# Altium PCB SectionC_BreakOut.PcbDoc
Units mm, origin at the board's own origin, x right, y up, seen from the top; angles counter-clockwise.
Board outline 78.8 x 84 mm, 2 copper layers (Top Layer, Bottom Layer), stack 1.569 mm thick; 55 components, 45 nets, 222 pads, 19 vias.
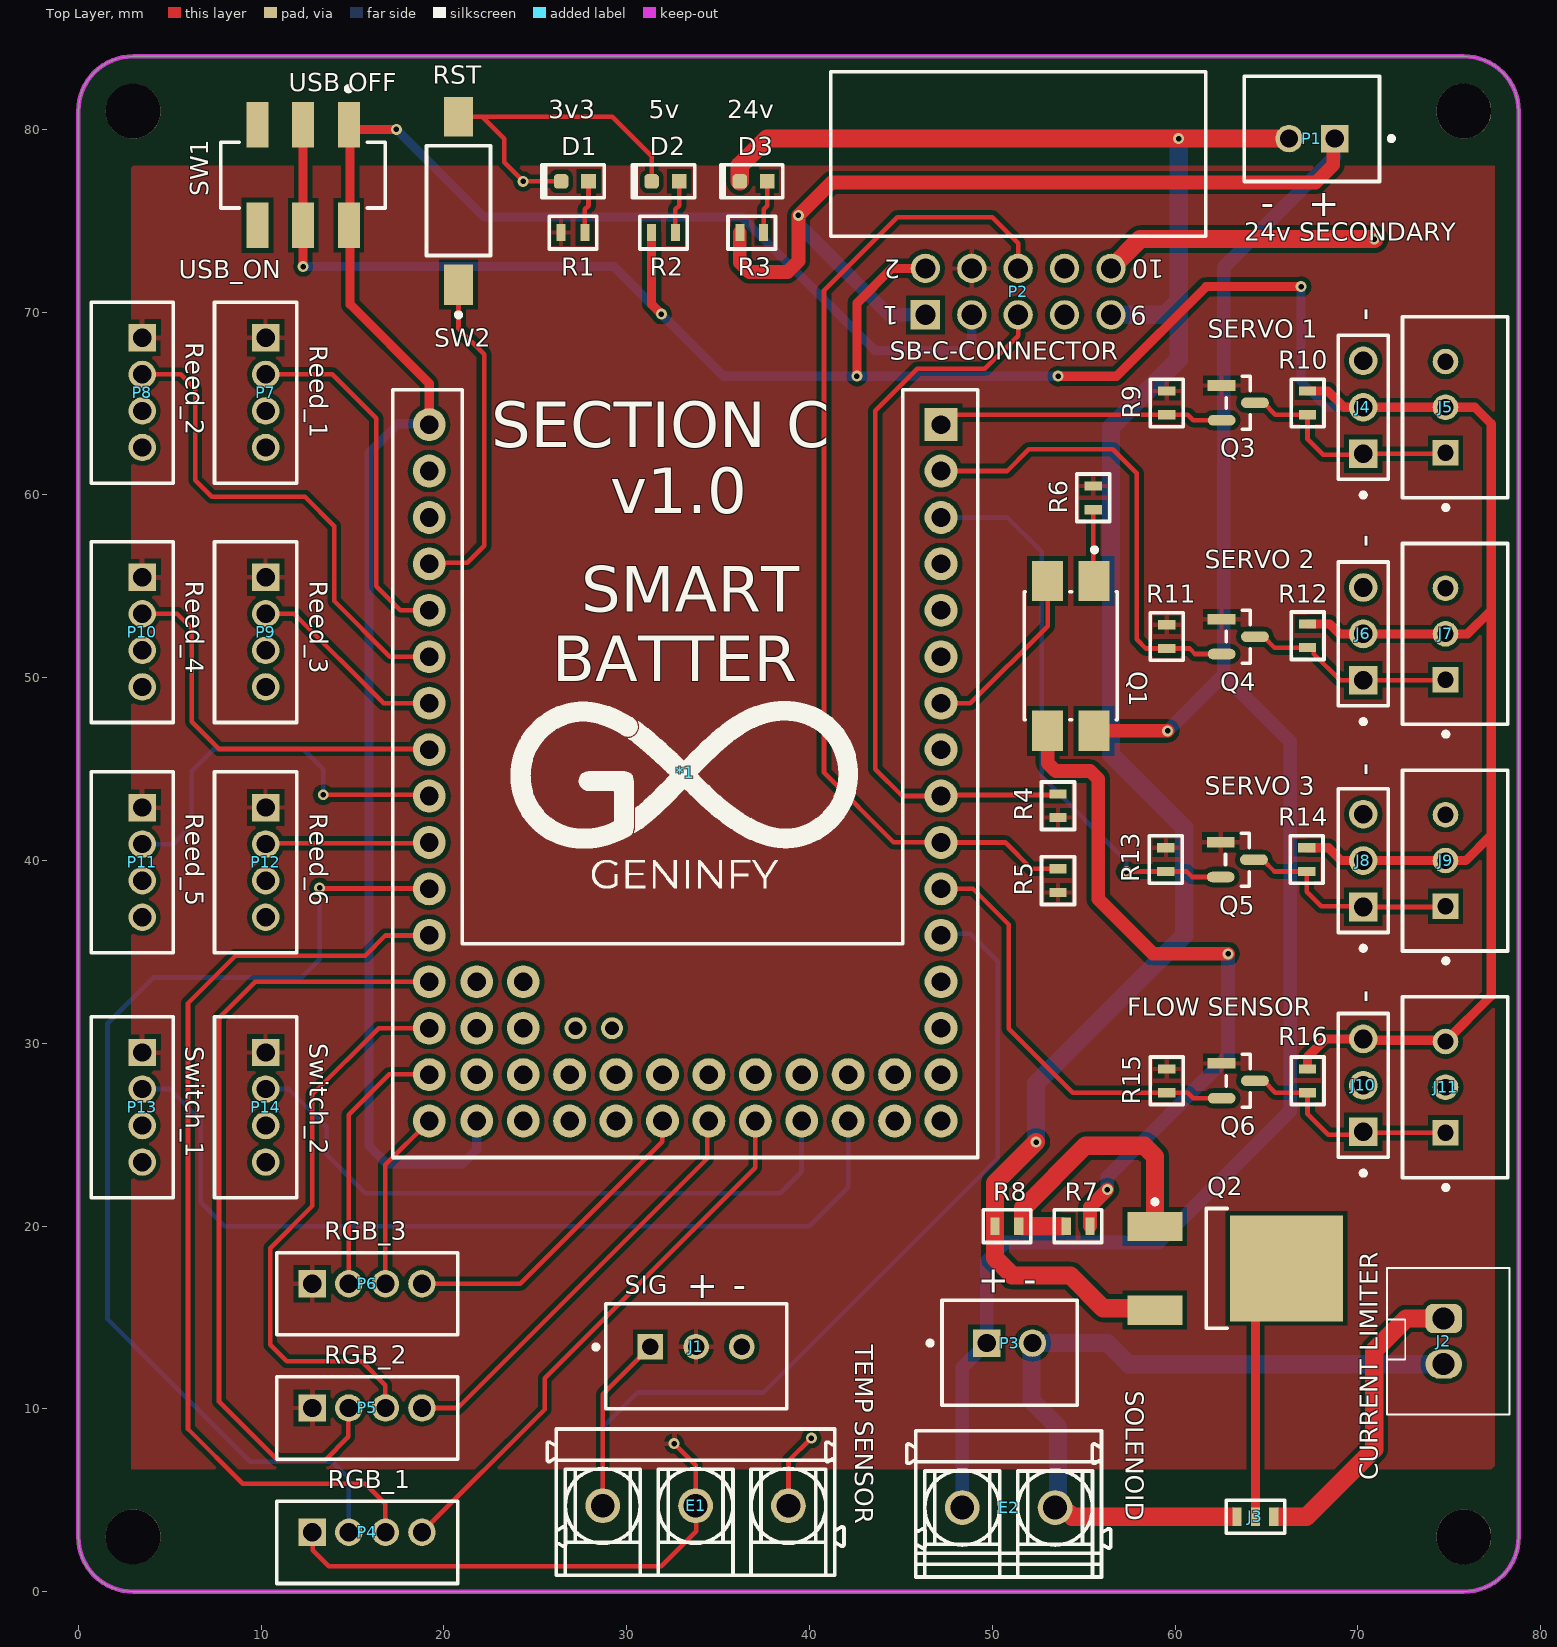
[diagram p0: Top Layer view]
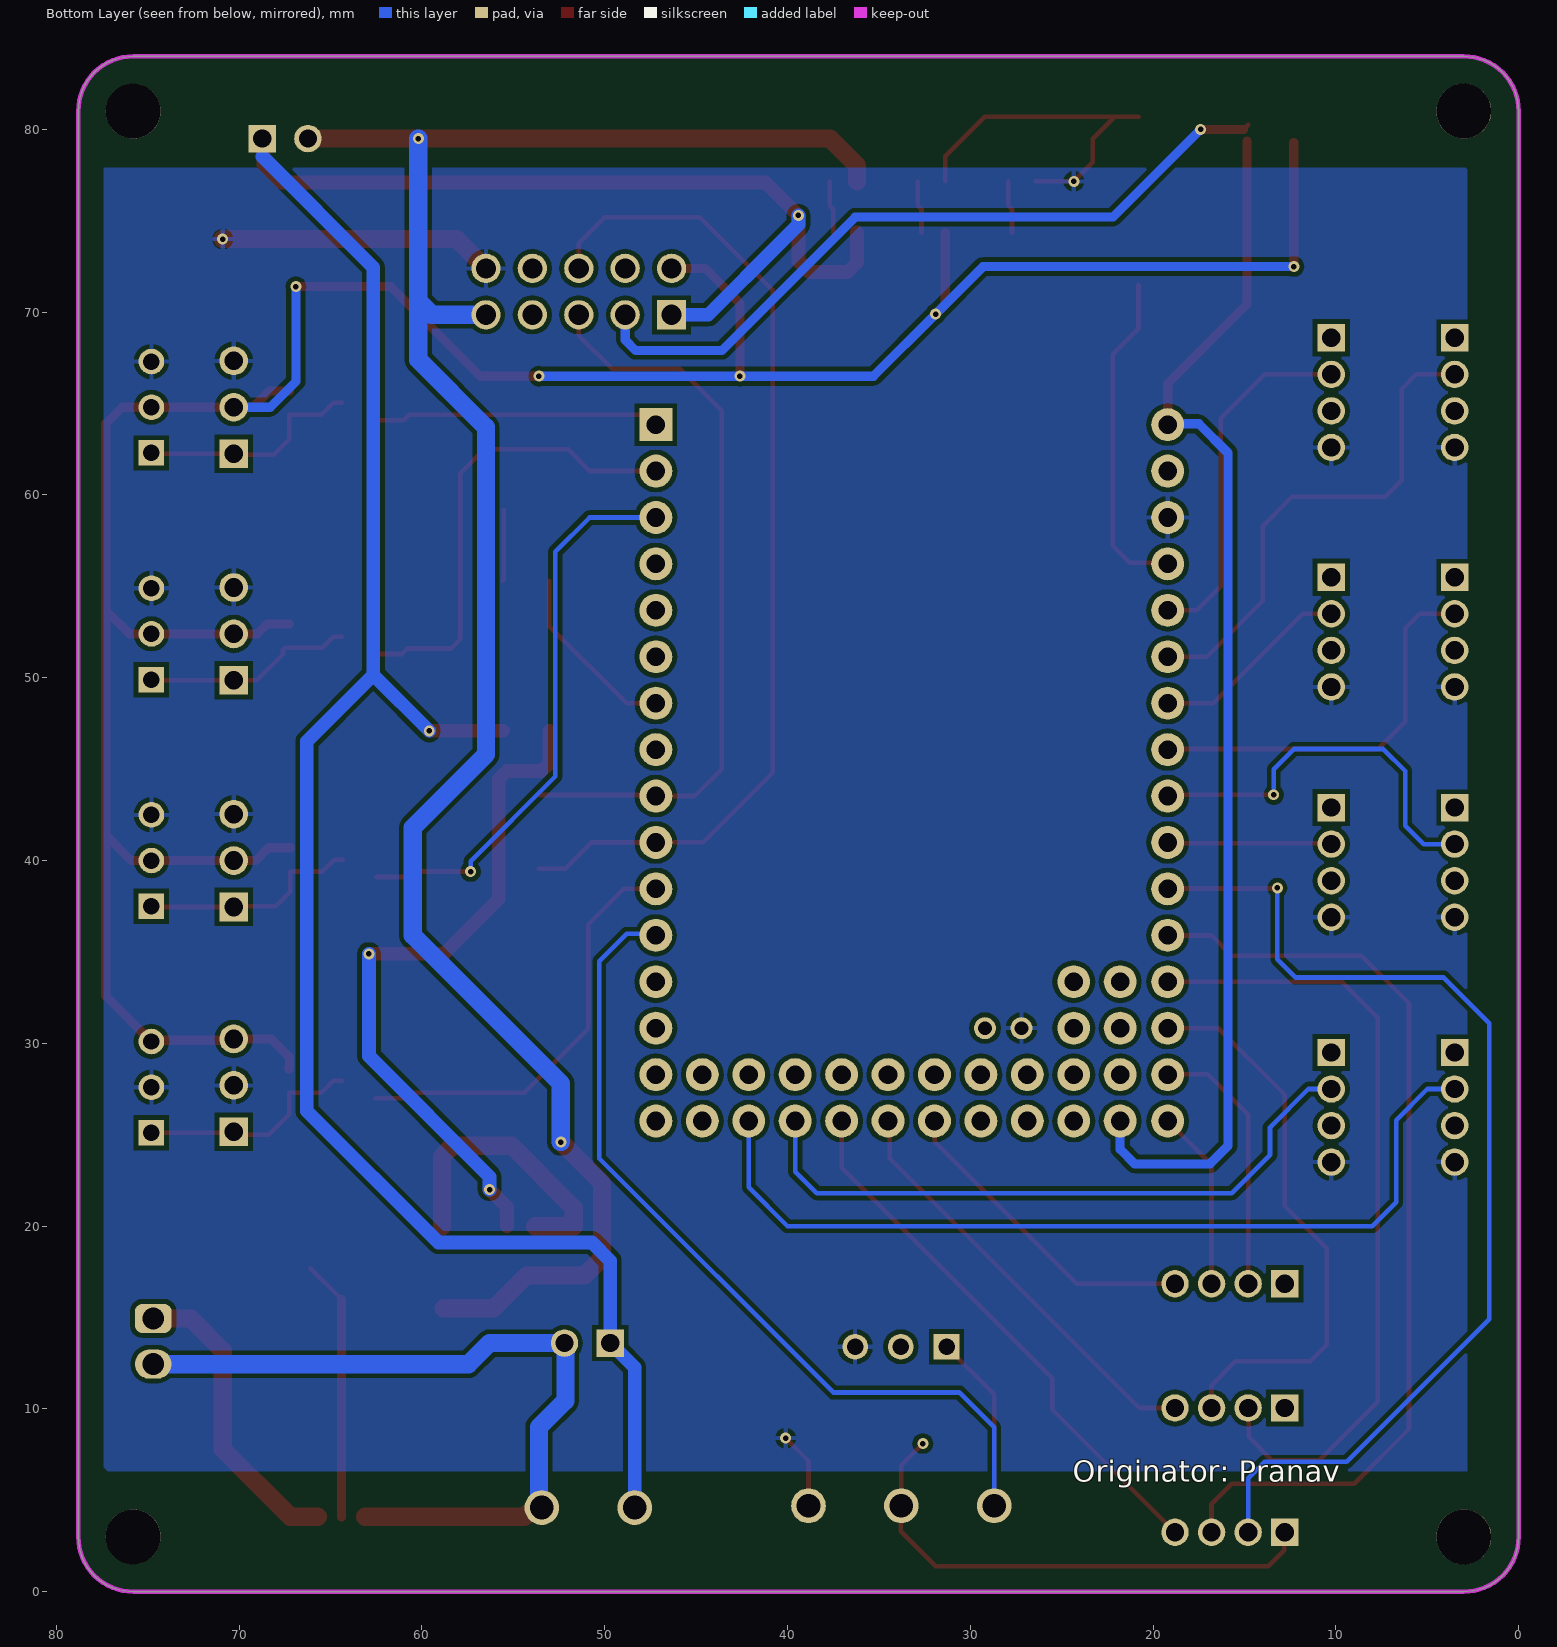
[diagram p1: Bottom Layer view, seen from below]
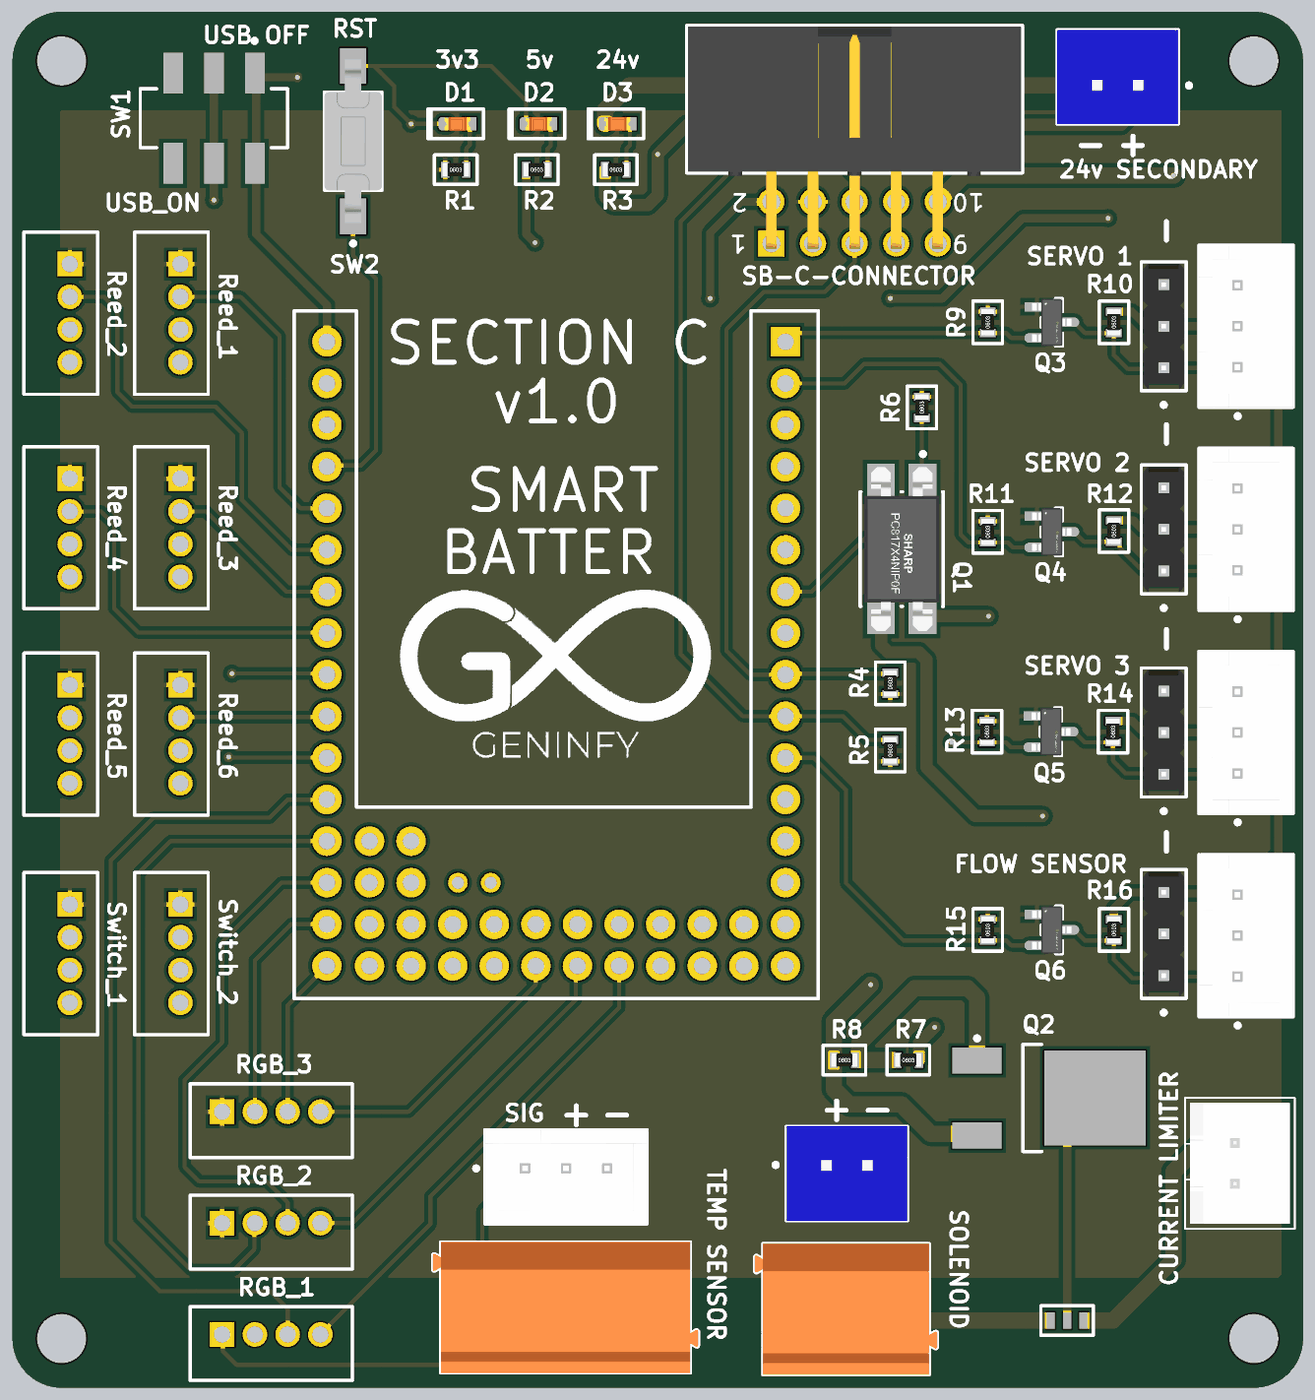
[diagram p2: 3D render of the assembled board from above, using the file's embedded part models]

## Layer stack, top to bottom
Top Solder: solder mask 0.0254, SM-001, Dk 4
Top Layer: signal copper 0.035
Dielectric 1: core 1.4986, Core-043, Dk 4.3
Bottom Layer: signal copper 0.035
Bottom Solder: solder mask 0.0254, SM-001, Dk 4

## Board outline
0,3 0,81 cw(c3,81) 3,84 75.8,84 cw(c75.8,81) 78.8,81 78.8,3 cw(c75.8,3) 75.8,0 3,0 cw(c3,3)

## Design rules (kind name [scope] priority, off if disabled: settings)
Clearance [All] p1: gap=0.254 ignorepadtopadclearanceinfootprint=FALSE except(0: Arc-Hole Track-Hole SMDPad-Hole THPad-Hole Via-Hole Fill-Hole Poly-Hole Region-Hole Text-Hole)
HoleSize [All] p1: absolutevalues=TRUE maxlimit=4 minlimit=0.025 maxpercent=80.000 minpercent=20.000
PolygonConnect [All] p1: connectstyle=Relief reliefconductorwidth=0.254 reliefentries=4 polygonreliefangle="90 Angle" airgapwidth=0.254
RoutingVias [All] p1: holewidth=0.711 width=1.27 viastyle="Through Hole" minholewidth=0.711 minwidth=1.27 maxholewidth=0.711 maxwidth=1.27
SilkToSolderMaskClearance [IsPad] p1: minsilkscreentomaskgap=0.25 clearancetoexposedcopper=TRUE
SolderMaskExpansion [All] p1: expansion=0.102 istentingtop=FALSE
Width [All] p1: maxlimit=2 minlimit=0.254 preferedwidth=0.254
28 further rules are at their usual default settings.

## Components (designator, comment, footprint, x,y, rotation, side; value= is the part's Value field where it differs from the comment)
*1 "PYBv1.1" PYBV1.1 33.2,44.8 r0 top
D1 "LED - Orange" LED0603-Orange 27.165,77.159 r0 top
D2 "LED - Orange" LED0603-Orange 32.118,77.159 r0 top
D3 "LED - Orange" LED0603-Orange 36.944,77.159 r0 top
E1 "1760500000" PM_5_08_90_03 33.771,4.9 r0 top
E2 "1760490000" PM_5_08_90_02 50.9,4.8 r0 top
J1 "B3B-XH-A(LF)(SN)" FP-B3B-XH-A_LF_SN-MFG 33.8,12.875 r0 top
J2 "JST-XH 2P" "JST-XH 2P" 74.7,13.7 r90 top
J3 "Solder Jumper" "Solder Jumper" 64.4,4.1 r0 top
J4 "22-28-4030" FP-22-28-4030-MFG 70.3,64.8 r90 top
J5 "B3B-XH-A(LF)(SN)" FP-B3B-XH-A_LF_SN-MFG 75.325,64.8 r90 top
J6 "22-28-4030" FP-22-28-4030-MFG 70.3,52.4 r90 top
J7 "B3B-XH-A(LF)(SN)" FP-B3B-XH-A_LF_SN-MFG 75.325,52.4 r90 top
J8 "22-28-4030" FP-22-28-4030-MFG 70.3,40 r90 top
J9 "B3B-XH-A(LF)(SN)" FP-B3B-XH-A_LF_SN-MFG 75.325,40 r90 top
J10 "22-28-4030" FP-22-28-4030-MFG 70.3,27.7 r90 top
J11 "B3B-XH-A(LF)(SN)" FP-B3B-XH-A_LF_SN-MFG 75.325,27.6 r90 top
P1 "B2B-XH-A(LF)(SN)" JST-B2B-XH-A_V 67.49,79.5 r180 top
P2 "61201021721" 61201021721 51.42,78.665 r180 top
P3 "B2B-XH-A(LF)(SN)" JST-B2B-XH-A_V 50.95,13.6 r0 top
P4 "B4B-PH-K-S(LF)(SN)" JST-B4B-PH-K-S_V 15.8,2.7 r0 top
P5 "B4B-PH-K-S(LF)(SN)" JST-B4B-PH-K-S_V 15.8,9.5 r0 top
P6 "B4B-PH-K-S(LF)(SN)" JST-B4B-PH-K-S_V 15.8,16.3 r0 top
P7 "B4B-PH-K-S(LF)(SN)" JST-B4B-PH-K-S_V 9.7,65.6 r270 top
P8 "B4B-PH-K-S(LF)(SN)" JST-B4B-PH-K-S_V 2.95,65.6 r270 top
P9 "B4B-PH-K-S(LF)(SN)" JST-B4B-PH-K-S_V 9.7,52.5 r270 top
P10 "B4B-PH-K-S(LF)(SN)" JST-B4B-PH-K-S_V 2.95,52.5 r270 top
P11 "B4B-PH-K-S(LF)(SN)" JST-B4B-PH-K-S_V 2.95,39.9 r270 top
P12 "B4B-PH-K-S(LF)(SN)" JST-B4B-PH-K-S_V 9.7,39.9 r270 top
P13 "B4B-PH-K-S(LF)(SN)" JST-B4B-PH-K-S_V 2.95,26.5 r270 top
P14 "B4B-PH-K-S(LF)(SN)" JST-B4B-PH-K-S_V 9.7,26.5 r270 top
Q1 "PC817X4NIP0F" FP-PC817X4NIP0F-MFG 54.3,51.2 r270 top
Q2 "NTD4805NT4G" ONSC-DPAK-3-369AA-01_V 63.3,17.69 r0 top
Q3 "BSS138" FP-318-08-IPC_B 63.462,65.041 r0 top
Q4 "BSS138" FP-318-08-IPC_B 63.462,52.25 r0 top
Q5 "BSS138" FP-318-08-IPC_B 63.41,40.05 r0 top
Q6 "BSS138" FP-318-08-IPC_B 63.462,27.95 r0 top
R1 "68R" "68R 0603" 27.065,74.359 r0 top
R2 "68R" "68R 0603" 32.018,74.359 r0 top
R3 "68R" "68R 0603" 36.844,74.359 r0 top
R4 "10k" "10k R0603" 53.6,43 r90 top
R5 "10k" "10k R0603" 53.6,38.9 r90 top
R6 "68R" "68R 0603" 55.529,59.846 r90 top
R7 "10k" "10k R0603" 54.7,20 r0 top
R8 "10k" "10k R0603" 50.8,20 r0 top
R9 "10k" "10k R0603" 59.551,65.041 r90 top
R10 "10k" "10k R0603" 67.251,65.041 r90 top
R11 "10k" "10k R0603" 59.551,52.25 r90 top
R12 "10k" "10k R0603" 67.251,52.3 r90 top
R13 "10k" "10k R0603" 59.5,40.05 r90 top
R14 "10k" "10k R0603" 67.2,40.05 r90 top
R15 "10k" "10k R0603" 59.551,27.95 r90 top
R16 "10k" "10k R0603" 67.251,27.95 r90 top
SW1 "JS202011SCQN" FP-JS202011SCQN-MFG 12.3,77.5 r180 top
SW2 "FSMSM" TECO-FSMSM-2_V 20.8,76.1 r90 top

## Footprints (in the part's own frame and the unit in brackets; to place one, negate y for a bottom-side part, rotate by r counter-clockwise, add the part's x,y. Pads: shape width x height; smd on the part's side, far side on the other; paste and mask are expansions set on the pad)
"10k R0603" [mm]
  rect 0.5x0.95 smd: 1(-0.65,0) 2(0.65,0)
  silkscreen extent -1.3,-0.9 1.3,0.9, body extent -0.8,-0.4 0.8,0.4, height 0.45
"68R 0603" [mm]
  rect 0.5x0.95 smd: 1(-0.65,0) 2(0.65,0)
  silkscreen extent -1.3,-0.9 1.3,0.9, body extent -0.8,-0.4 0.8,0.4, height 0.45
61201021721 [mm] "10 pins, right angled, gold plating"
  rect 1.6x1.6 hole 1.1: 1(5.08,8.805)
  round 1.6 hole 1.1: 2(5.08,6.265) 3(2.54,8.805) 4(2.54,6.265) 5(0,8.805) 6(0,6.265) 7(-2.54,8.805) 8(-2.54,6.265) 9(-5.08,8.805) 10(-5.08,6.265)
  silkscreen extent -10.26,-4.5 10.26,4.5, body extent -10.18,-4.42 10.18,9.13, height 9.23
FP-22-28-4030-MFG [mm]
  rect 1.57x1.57 hole 1.02 paste-1000 mask+0: 1(-2.54,0)
  round 1.57 hole 1.02 paste-1000 mask+0: 2(0,0) 3(2.54,0)
  silkscreen extent -4.92,-1.37 3.94,1.37, body extent -4.04,-1.47 4.04,1.47, height 0.25
FP-318-08-IPC_B [mm]
  rect 1.524x0.578 smd paste+0 mask+0: 1(-0.91,0.95)
  rrect100% 1.524x0.578 smd paste+0 mask+0: 2(-0.91,-0.95) 3(0.91,0)
  silkscreen extent -0.65,-1.45 0.65,1.45, body extent -1.92,-1.7 1.92,1.7, height 0.25
FP-B3B-XH-A_LF_SN-MFG [mm]
  rect 1.4x1.4 hole 0.9 paste-1000 mask+0: 1(-2.5,0.525)
  round 1.4 hole 0.9 paste-1000 mask+0: 2(0,0.525) 3(2.5,0.525)
  silkscreen extent -5.61,-2.88 4.95,2.88, body extent -5.05,-2.98 5.05,2.98, height 0.25
FP-JS202011SCQN-MFG [mm]
  rect 1.2x2.5 smd paste+0 mask+0: 1(-2.5,-2.75) 2(0,-2.75) 3(2.5,-2.75) 4(-2.5,2.75) 5(0,2.75) 6(2.5,2.75)
  silkscreen extent -4.5,-4.85 4.5,1.8
FP-PC817X4NIP0F-MFG [mm]
  rect 2.2x1.7 smd paste+0 mask+0: 1(-4.1,1.27) 2(-4.1,-1.27) 3(4.1,-1.27) 4(4.1,1.27)
  silkscreen extent -5.92,-2.54 3.5,2.54, body extent -5.3,-2.64 5.3,2.64, height 0.25
JST-B2B-XH-A_V [mm] "Header, 2-Leads, Body 7.4x5.75mm, Pitch 2.5mm"
  rect 1.5x1.5 hole 1: 1(-1.25,0)
  round 1.5 hole 1: 2(1.25,0)
  silkscreen extent -4.47,-3.4 3.7,2.35, body extent -3.7,-3.4 3.7,2.35, height 7
JST-B4B-PH-K-S_V [mm] "Connector, 4-Leads, Body 9.9x4.5mm, Pitch 2mm"
  rect 1.5x1.5 hole 1: 1(-3,0.55)
  round 1.5 hole 1: 2(-1,0.55) 3(1,0.55) 4(3,0.55)
  silkscreen extent -4.95,-2.25 4.95,2.25, body extent -4.95,-2.25 4.95,2.25, height 6
"JST-XH 2P" [mm]
  rrect50% 1.6x2 hole 1.2: 1(1.25,0)
  oval 1.6x2 hole 1.2: 2(-1.25,0)
  silkscreen extent -4,-3.6 4,3.1, body extent -3.7,-3.3 3.7,2.8, height 7.01
LED0603-Orange [mm]
  rrect50% 0.8x0.8 smd: 1(-0.75,0)
  rect 0.8x0.8 smd: 2(0.75,0)
  silkscreen extent -1.8,-0.9 1.6,1, body extent -0.8,-0.4 0.8,0.4, height 0.7
ONSC-DPAK-3-369AA-01_V [mm] "DPAK, 3-Leads, Body 6.54x6.095mm, Pitch 2.29mm"
  rect 3x1.6 smd: 1(-4.4,2.29) 3(-4.4,-2.29)
  rect 6.2x5.8 smd: 4(2.8,0)
  silkscreen extent -4.52,-3.27 -0.45,3.76, body extent -1.6,-3.27 4.49,3.27, height 2.47
PM_5_08_90_02 [mm] "PM 5.08/02/90 3.5"
  round 1.9 hole 1.3: A1(-2.54,-0.2) A2(2.54,-0.2)
  silkscreen extent -5.58,-4 5.58,4, body extent -5.58,-4 5.58,4, height 10.01
PM_5_08_90_03 [mm] "PM 5.08/03/90 3.5"
  round 1.9 hole 1.3: A1(-5.08,-0.2) A2(0,-0.2) A3(5.08,-0.2)
  silkscreen extent -8.12,-4 8.12,4, body extent -8.12,-4 8.12,4, height 10.01
PYBV1.1 [mm]
  rect 1.8x1.8 hole 1.02: 1(14,19.05)
  round 1.8 hole 1.02: 2(14,16.51) 3(14,13.97) 4(14,11.43) 5(14,8.89) 6(14,6.35) 7(14,3.81) 8(14,1.27) 9(14,-1.27) 10(14,-3.81) 11(14,-6.35) 12(14,-8.89) 13(14,-11.43) 14(14,-13.97) 15(14,-16.51) 16(14,-19.05) 17(-14,19.05) 18(-14,16.51) 19(-14,13.97) 20(-14,11.43) 21(-14,8.89) 22(-14,6.35) 23(-14,3.81) 24(-14,1.27) 25(-14,-1.27) 26(-14,-3.81) 27(-14,-6.35) 28(-14,-8.89) 29(-14,-11.43) 30(-14,-13.97) 31(-14,-16.51) 32(-14,-19.05) 33(11.46,-19.05) 34(8.92,-19.05) 35(6.38,-19.05) 36(3.84,-19.05) 37(1.3,-19.05) 38(-1.24,-19.05) 39(-3.78,-19.05) 40(-6.32,-19.05) 41(-8.86,-19.05) 42(-11.4,-19.05) 43(11.46,-16.51) 44(8.92,-16.51) 45(6.38,-16.51) 46(3.84,-16.51) 47(1.3,-16.51) 48(-1.24,-16.51) 49(-3.78,-16.51) 50(-6.32,-16.51) 51(-8.86,-16.51) 51(-8.86,-13.97) 51(-8.86,-11.43) 52(-11.4,-16.51) 52(-11.4,-13.97) 52(-11.4,-11.43)
  round 1.2 hole 0.75: 53(-4,-13.97) 54(-6,-13.97)
  silkscreen extent -16,-21.05 16,20.95
"Solder Jumper" [mm]
  rect 0.5x1 smd: 1(-1,0) 2(0,0) 3(1,0)
  silkscreen extent -1.6,-0.9 1.6,0.9
TECO-FSMSM-2_V [mm] "SMD, 2-Leads, Body 6x3.5mm, Pitch 9.19mm"
  rect 2.2x1.6 smd: 1(-4.595,0)
  rect 2.18x1.6 smd: 2(4.595,0)
  silkscreen extent -6.37,-1.75 3,1.75, body extent -4.98,-1.75 4.98,1.75, height 4.4

## Part data
D1 D2 D3: library part LTST-C191KFKT, "LED ORANGE CLEAR SMD", Case Code (Imperial)=0603, Case Code (Metric)=1608, Color=Orange, Forward Current=30mA, Forward Voltage=2V, Lens Color=Colorless, Manufacturer="Vishay Lite-On", Max Operating Temperature=85°C, Min Operating Temperature=-55°C, Package Quantity=1, Power Dissipation=75mW, Reverse Voltage=5V, Supplier Part Number 1=160-1445-1-ND, Test Current=20mA, Case/Package=0603, Category=LEDs, ComponentLink1Description=https://datasheet.ciiva.com/2109/ltst-c191kfkt-2109968.pdf?src-supplier=Digi-Key, ComponentLink1URL=https://datasheet.ciiva.com/2109/ltst-c191kfkt-2109968.pdf?src-supplier=Digi-Key, ComponentLink2Description=https://datasheet.ciiva.com/12400/100-ltst-c191kfkt-39904-12400811.pdf?src-supplier=Mouser, ComponentLink2URL=https://datasheet.ciiva.com/12400/100-ltst-c191kfkt-39904-12400811.pdf?src-supplier=Mouser, ComponentLink3Description=https://datasheet.ciiva.com/11775/0900766b80dc02b0-11775613.pdf?src-supplier=RSComponents, ComponentLink3URL=https://datasheet.ciiva.com/11775/0900766b80dc02b0-11775613.pdf?src-supplier=RSComponents, ComponentLink4Description=https://datasheet.ciiva.com/15201/getdatasheetpartid-631075-15201391.pdf?src-supplier=Verical, ComponentLink4URL=https://datasheet.ciiva.com/15201/getdatasheetpartid-631075-15201391.pdf?src-supplier=Verical, ComponentLink5Description=https://datasheet.ciiva.com/2109/s-110-ltst-c191kfkt-2109969.pdf?src-supplier=Digi-Key, ComponentLink5URL=https://datasheet.ciiva.com/2109/s-110-ltst-c191kfkt-2109969.pdf?src-supplier=Digi-Key, Depth=0.8mm, Dominant Wavelength=605nm, Height=0.55mm, Illumination Color=Orange, Lead Free="Lead Free", Length=1.6mm, Lens Style=Diffused,Colorless,Rectangular, Lens Transparency=Clear, Luminous Intensity=90mcd, Manufacturer Part Number=LTST-C191KFKT, Mount="Surface Mount", Number of Elements=1, Number of LEDs=1, Number of Pins=2, Packaging="Tape and Reel", Power Rating=75mW, Pricing 1="1=0.24000, 10=0.17900, 100=0.08460, 500=0.05640, 1000=0.04418, 2500=0.04324 (USD)", Radiation Hardening=No, RoHS=Yes, Stock 1=92562, Supplier 1=Digi-Key, Viewing Angle=130°, Wavelength=611nm, Width=0.8mm
E1: library part CMP-1559-01629-1, "OMNIMATE Signal - series PM", Colour=Orange, Manufacturer=Weidmueller, Rated_current_use_group_B_UL_1059="15 A", Rated_voltage_for_surge_voltage_class_pollution_degree_II_2="600 V", Rated_voltage_use_group_B_UL_1059="300 V", UL_94_flammability_rating=V-0, ComponentLink1Description="Manufacturer URL", ComponentLink1URL=http://www.weidmueller.com/, ComponentLink2Description="URL Link1", ComponentLink2URL=http://catalog.weidmueller.com/catalog/Start.do?localeId=en&ObjectID=1760500000, Contact_material=Cu-Leg, Contact_surface=tinned, Insulating_material="Wemid (PA)", Mounting_onto_the_PCB="Solder connection", No_of_poles=3, PackageReference=PM_5_08_90_03, Packaging=Box, PartNumber=1760500000, Pitch_inch="0,2 inch", Pitch_mm="5,08 mm", Qty="500 PCS", Revision=V1, Short_text_for_material="PM 5.08/03/90 3.5SN OR BX", Side_termination_characteristic="closed side", Solder_pin_length_mm="3,5 mm", Solid_max_H05_07_V_U="2,5 mm²", Solid_min_H05_07_V_U="0,13 mm²", Wire_cross_section_AWG_max_UL_1059="AWG 14", Wire_cross_section_AWG_min_UL_1059="AWG 26"
E2: library part CMP-1559-01627-1, "OMNIMATE Signal - series PM", Colour=Orange, Manufacturer=Weidmueller, Rated_current_use_group_B_UL_1059="15 A", Rated_voltage_for_surge_voltage_class_pollution_degree_II_2="600 V", Rated_voltage_use_group_B_UL_1059="300 V", UL_94_flammability_rating=V-0, ComponentLink1Description="Manufacturer URL", ComponentLink1URL=http://www.weidmueller.com/, ComponentLink2Description="URL Link1", ComponentLink2URL=http://catalog.weidmueller.com/catalog/Start.do?localeId=en&ObjectID=1760490000, Contact_material=Cu-Leg, Contact_surface=tinned, Insulating_material="Wemid (PA)", Mounting_onto_the_PCB="Solder connection", No_of_poles=2, PackageReference=PM_5_08_90_02, Packaging=Box, PartNumber=1760490000, Pitch_inch="0,2 inch", Pitch_mm="5,08 mm", Qty="500 PCS", Revision=V1, Short_text_for_material="PM 5.08/02/90 3.5SN OR BX", Side_termination_characteristic="closed side", Solder_pin_length_mm="3,5 mm", Solid_max_H05_07_V_U="2,5 mm²", Solid_min_H05_07_V_U="0,13 mm²", Wire_cross_section_AWG_max_UL_1059="AWG 14", Wire_cross_section_AWG_min_UL_1059="AWG 26"
J1 J5 J7 J9 J11: library part CMP-17439-000014-1, "CONN HEADER VERT 3POS 2.5MM", Current Rating=3A, Manufacturer=JST, Package=0, Temperature="-25°C to +85°C", Temperature Range High=+85°C, Temperature Range Low=-25°C, Voltage Rating=250V, Automotive=No, Category=Conn, ComponentLink2Description=Datasheet, ComponentLink2URL=https://www.jst-mfg.com/product/pdf/eng/eXH.pdf, Conn Gender=Male, Conn Orientation=Vertical, Contact Material=Tin,Copper, Device Class L1=Connectors, Device Class L2="Headers and Wire Housings", Device Class L3=unset, Digikey Description="CONN HEADER VERT 3POS 2.5MM", Height=7mm, Lead Free=Yes, Manufacturer Part Number=B3B-XH-A(LF)(SN), Number of Contacts=3, Number Of Rows=1, Octopart=https://octopart.com/b3b-xh-a%28lf%29%28sn%29-jst-3990185, Pitch=2.5mm, RoHS=TRUE
J2: library part B2B-XH-A(LF)(SN), "JST-XH 2 POS 2.5mm Solder ST Thru-Hole Box", Color=Natural, Contact Resistance=20mR, Current Rating=3A, Housing Color=White, Insulation Resistance=1GR, Manufacturer=JST, Max Operating Temperature=85°C, Max Voltage Rating (AC)=250V, Min Operating Temperature=-25°C, Supplier Part Number 1=1516276, Category="FFC / FPC", ComponentLink1Description=https://datasheet.ciiva.com/26894/getdatasheetpartid-640357-26894434.pdf?src-supplier=Verical, ComponentLink1URL=https://datasheet.ciiva.com/26894/getdatasheetpartid-640357-26894434.pdf?src-supplier=Verical, ComponentLink2Description=https://datasheet.ciiva.com/11746/0900766b8082653e-11746979.pdf?src-supplier=RSComponents, ComponentLink2URL=https://datasheet.ciiva.com/11746/0900766b8082653e-11746979.pdf?src-supplier=RSComponents, ComponentLink3Description=https://datasheet.ciiva.com/26894/getdatasheetpartid-385291-26894760.pdf?src-supplier=Verical, ComponentLink3URL=https://datasheet.ciiva.com/26894/getdatasheetpartid-385291-26894760.pdf?src-supplier=Verical, ComponentLink4Description=https://datasheet.ciiva.com/8052/5448-8052024.pdf?src-supplier=Element14, ComponentLink4URL=https://datasheet.ciiva.com/8052/5448-8052024.pdf?src-supplier=Element14, ComponentLink5Description=https://datasheet.ciiva.com/20207/523653-20207167.pdf?src-supplier=Rapid+Electronics, ComponentLink5URL=https://datasheet.ciiva.com/20207/523653-20207167.pdf?src-supplier=Rapid+Electronics, Connector Type="Male Pin", Contact Material=Brass, Contact Plating=Tin,Copper,Lead, Depth=5.75mm, Fastening Type=Detent, Housing Material=Polyamide, Lead Free="Lead Free", Lead Pitch=2.5mm, Length=7.4mm, Manufacturer Part Number=B2B-XH-A(LF)(SN), Max Current Rating=3A, Max Voltage Rating (DC)=250V, Mount="Through Hole", Number of Contacts=2, Number of Positions=2, Number Of Rows=1, Orientation=Straight, Packaging=Bulk, Pitch=2.5mm, REACH SVHC="No SVHC", RoHS=Yes, Stock 1=165899, Supplier 1=Element14, Termination=Solder, Voltage Rating=250V, Voltage Rating (AC)=250V, Wire/Cable Gauge=22AWG
J4 J6 J8 J10: library part CMP-04776-000098-1, "CONN HEADER VERT 3POS 2.54MM", Current Rating=4A, Manufacturer=Molex, Temperature="-40°C to +80°C", Temperature Range High=+80°C, Temperature Range Low=-40°C, Voltage Rating=500V, Automotive=No, Category=Conn, ComponentLink2Description=Datasheet, ComponentLink2URL=https://www.molex.com/webdocs/datasheets/pdf/en-us/0022284030_PCB_HEADERS.pdf, Conn Gender=Male, Conn Orientation=Vertical, Contact Material=Gold,Nickel, Device Class L1=Connectors, Device Class L2="Headers and Wire Housings", Device Class L3=unset, Digikey Description="CONN HEADER VERT 3POS 2.54MM", Footprint Url=https://www.molex.com/pdm_docs/sd/022284030_sd.pdf, Height=8.88mm, Lead Free=Yes, Manufacturer Part Number=22-28-4030, Mouser Description="Headers & Wire Housings 3P VERT HEADER Sn", Number of Contacts=3, Number Of Rows=1, Octopart=https://octopart.com/0022284030-molex-10476094, Package=22-28-4030, Pitch=2.54mm, RoHS=TRUE
P1 P3: library part CMP-2000-05888-1, "Male Header, Pitch 2.5 mm, 1 x 2 Position, Height 7 mm, Tail Length 3.4 mm, -25 to 85 degC, RoHS, Bulk", Manufacturer=JST, Package Description="Male Header, Pitch 2.5 mm, 1 x 2 Position, Height 7 mm, Tail Length 3.4 mm", Package Reference=B2B-XH-A, Datasheet URL=http://www.jst-mfg.com/product/pdf/eng/eXH.pdf, Datasheet Version=05/2016, Manufacturer URL=http://www.jst.com/home2.html, Mounting Technology=ThroughHole, No of Positions=2, Pitch=2.5mm, Style/Orientation=StraightHeader/Plug, Termination=Crimp, Type=ShroudedHeader
P2: library part CMP-1502-00021-1, "Male Box Header WR-BHD, THT, Angled, pitch 2.54 mm, 10 pins", Contact Resistance=20mOhm, Manufacturer="Wurth Elektronik", Operating Temperature=-40to125degC, Withstanding Voltage=500VAC, Working Voltage=250VAC, Datasheet URL=https://katalog.we-online.de/em/datasheet/6120xx21721.pdf, Gender=Male, Manufacturer URL=http://www.we-online.de, Mounting Technology=THT, Orientation=Angled, Package Reference=61201021721, Packaging=Tray, Part Number=61201021721, Pin Number=10, Pitch=2.54mm, Published Date=August2018, Publisher=WurthElektronik
P4 P5 P6 P7 P8 P9 P10 P11 P12 P13 P14: library part CMP-2000-05165-1, "Male Header, Pitch 2 mm, 1 x 4 Position, Height 6 mm, Tail Length 3.4 mm, -25 to 85 degC, RoHS, Bulk", Manufacturer=JST, Datasheet URL=http://datasheet.octopart.com/B4B-PH-K-S%28LF%29%28SN%29-JST-datasheet-10558886.pdf, Datasheet Version=Apr-09, Manufacturer URL=http://www.jst.com/home2.html, No of Positions=4, Pitch=2mm, Style/Orientation=StraightHeader/Plug, Termination=Crimp, Type=ShroudedHeader
Q1: library part CMP-65434-000001-1, "OPTOISOLATOR 5KV TRANS 4SMD", Collector Emitter Voltage=80V, Emiiter Collector Voltage=6V, Forward Current=20mA, Forward Voltage=1.2V, Isolation Voltage=5kVrms, Manufacturer=Sharp, Max Current Transfer Ratio=600%, Min Current Transfer Ratio=50%, Power Dissipation=200mW, Temperature="-30°C to +100°C", Temperature Range High=+100°C, Temperature Range Low=-30°C, Automotive=No, Category=Trans, ComponentLink2Description=Datasheet, ComponentLink2URL=https://www.sharpsde.com/fileadmin/products/Optoelectronics/Isolation%20Devices/Specs%20Photocoupler/PC817XxNIP0F_17Jun08_Spec_ED-04P129A.pdf, Device Class L1=Optoelectronics, Device Class L2=Optocouplers, Device Class L3=unset, Digikey Description="OPTOISOLATOR 5KV TRANS 4SMD", Height=4.6mm, Lead Free=Yes, Manufacturer Part Number=PC817X4NIP0F, Mouser Description="Transistor Output Optocouplers Photocoupler 300-600% CRT", Octopart=https://octopart.com/pc817x4nip0f-sharp-20650453, Package=PC817X4NIP0F, Reverse Voltage=6V, RoHS=TRUE, Standoff Height=0.1mm
Q2: library part CMP-1058-00313-1, "Power MOSFET, 30 V, 88 A, Single N-Channel, 3-Pin DPAK, Pb-Free, Tape and Reel", Manufacturer="On Semiconductor", Package Type="DPAK-3, IPAK-4", Channel Polarity="N Channel", Ciss Typ (pF)=2865, ComponentLink1Description="Manufacturer URL", ComponentLink1URL=http://www.onsemi.com/, ComponentLink2Description=Datasheet, ComponentLink2URL=http://www.onsemi.cn/pub_link/Collateral/NTD4805N-D.PDF, ComponentLink3Description="Package Specification", ComponentLink3URL=http://www.onsemi.cn/pub_link/Collateral/369AA.PDF, Configuration=Single, Coss Typ (pF)=610, Crss Typ (pF)=338, DatasheetVersion="Rev. 7", ID Max (A)=88, Mounting Technology="Surface Mount", PackageDescription="3-Pin Flange Mount, Body 6.54 x 6.095 mm, Pitch 2.29 mm", PackageReference=DPAK-3-369AA-01, PackageVersion="Rev. B, 06/2010", Packing="Tape and Reel", PartNumber=NTD4805NT4G, Qrr Typ (nC)=18, RoHS=Pb-Free, V(BR)DSS Min (V)=30, VGS Max (V)=20, VGS(th) Max (V)=2.5
Q3 Q4 Q5 Q6: library part CMP-07173-000101-1, "MOSFET N-CH 50V 220MA SOT-23", Case/Package=SOT-23, Continuous Drain Current (ID)=220mA, Drain to Source Breakdown Voltage=50V, Drain to Source Resistance=3.5R, Gate to Source Voltage (Vgs)=20V, Input Capacitance=27pF, Max Operating Temperature=150°C, Max Power Dissipation=360mW, Min Operating Temperature=-55°C, On-State Resistance=6R, Package Quantity=1, Threshold Voltage=1.3V, Contact Plating=Tin, Current Rating=220mA, Drain to Source Voltage (Vdss)=50V, Dual Supply Voltage=50V, Element Configuration=Single, Fall Time=9ns, Height=0.93mm, Lead Free="Lead Free", Length=2.92mm, Mount="Surface Mount", Nominal Vgs=1.3V, Number of Elements=1, Number of Pins=3, Packaging="Tape and Reel", Power Dissipation=360mW, Radiation Hardening=No, Rds On Max=3.5R, REACH SVHC="No SVHC", Rise Time=9ns, Termination=SMD/SMT, Turn-Off Delay Time=20ns, Turn-On Delay Time=2.5ns, Voltage Rating (DC)=50V, Weight=0.03g, Width=1.3mm
R1 R2 R3 R6: library part CRGP0603F68R, "CRGP 0603 68R 1%", Case Code (Imperial)=0603, Case Code (Metric)=1608, Manufacturer="TE Connectivity", Max Operating Temperature=155°C, Max Power Dissipation=250mW, Min Operating Temperature=-55°C, Resistor Type="Thick Film", Supplier Part Number 1=A130402CT-ND, Temperature Coefficient=200ppm/°C, Tolerance=1%, Case/Package=0603, Category="Chip SMD Resistors", ComponentLink1Description=https://www.te.com/commerce/DocumentDelivery/DDEController?Action=srchrtrv&amp;DocNm=9-1773463-9&amp;DocType=DS&amp;DocLang=English&src-supplier=Digi-Key, ComponentLink1URL=https://www.te.com/commerce/DocumentDelivery/DDEController?Action=srchrtrv&amp;DocNm=9-1773463-9&amp;DocType=DS&amp;DocLang=English&src-supplier=Digi-Key, Manufacturer Part Number=CRGP0603F68R, Number of Terminations=2, Packaging="Tape and Reel", Pricing 1="1=0.14000, 10=0.11400, 100=0.04470, 1000=0.01870, 2500=0.01714 (USD)", Resistance=68R, RoHS=No, Stock 1=49308, Supplier 1=Digi-Key
R4 R5 R7 R8 R9 R10 R11 R12 R13 R14 R15 R16: library part CRG0603F10K/10, "RES 10.0K OHM 1/10W 1% 0603", Case Code (Imperial)=0603, Manufacturer="TE Connectivity", Max Operating Temperature=125°C, Max Power Dissipation=100mW, Min Operating Temperature=-55°C, Number of Resistors=1, Package Quantity=10000, Resistance=10kR, Resistor Type="Thick Film", Supplier Part Number 1=A121523CT-ND, Temperature Coefficient=100ppm/°C, Tolerance=1%, Voltage Rating=50V, Case/Package=0603, Category="Chip SMD Resistors", ComponentLink1Description=https://datasheet.ciiva.com/2530/eng-cd-1622829-ba-2530062.pdf?src-supplier=Digi-Key, ComponentLink1URL=https://datasheet.ciiva.com/2530/eng-cd-1622829-ba-2530062.pdf?src-supplier=Digi-Key, Depth=0.8mm, ELV=Compliant, Height=0.022inch, Length=1.6mm, Manufacturer Part Number=CRG0603F10K/10, Military Standard=Not, Mount="Surface Mount", Number of Terminations=2, Packaging="Tape and Reel", Power Rating=100mW, Pricing 1="1=0.10000, 10=0.03100, 100=0.01270, 1000=0.00570, 2500=0.00494, 5000=0.00409 (USD)", Radiation Hardening=No, RoHS=Yes, Stock 1=172089, Supplier 1=Digi-Key, Termination=Solder, Weight=7.1E-05oz, Width=0.8mm
SW1: library part CMP-10038-000011-1, "SWITCH SLIDE DPDT 300MA 6V", Contact Current Rating=300mA, Contact Resistance=70mR, Flammability Rating="UL94 V-2", Max Operating Temperature=85°C, Max Voltage Rating (DC)=6V, Min Operating Temperature=-20°C, Package Quantity=1, Actuator Length=2mm, Actuator Material=Nylon, Actuator Type=Standard, Contact Material="Copper Alloy", Contact Plating=Silver, Current Rating=300mA, Depth=7.5mm, Electrical Life=5000Cycles, Housing Material=Nylon, Lead Free="Lead Free", Length=9mm, Max Current Rating=300mA, Mount="Surface Mount", Orientation=Vertical, Packaging="Tape and Reel", Radiation Hardening=No, REACH SVHC="No SVHC", Switch Function=On-On, Switch Travel=2mm, Termination="Gull Wing", Throw Configuration=DPDT, Voltage Rating (DC)=6V
SW2: library part CMP-2000-07511-1, "FSMSM Push Button Switch, 50 mA, -35 to 85 degC, 2-Pin SMD, RoHS, Bulk", Case\/Package=SMD/SMT, Contact Current Rating=50mA, Contact Resistance=100mOhm, Manufacturer="TE Connectivity", Max Operating Temperature=85degC, Max Voltage Rating (DC)=12V, Min Operating Temperature=-35degC, Operating Force=180gf, Package Description="2-Pin Surface Mount Device, Body 6 x 3.5 mm, Pitch 9.19 mm", Package Quantity=1000, Voltage Rating (DC)=24V, Actuator Length=1.07mm, Actuator Material=Polyamide, Contact Material=Brass, Contact Plating=Silver, Current Rating=50mA, Datasheet URL=http://www.te.com/commerce/DocumentDelivery/DDEController?Action=showdoc&DocId=Customer+Drawing%7F1437566-3%7FC2%7Fpdf%7FEnglish%7FENG_CD_1437566-3_C2_1437566_3_1_c.dwg.pdf%7F1437566-3, Datasheet Version="Rev. C2, 08/2014", Electrical Life=20000Cycles, ELV=Compliant, Illumination Type=Illuminated, Lead Free=LeadFree, Manufacturer URL=http://www.te.com/, Mechanical Life=20000Cycles, Mount=SurfaceMount, Mounting Technology=SurfaceMount, Orientation=Straight, Package Reference=FSMSM, Packaging=LoosePiece, REACH SVHC=Unknown, RoHSCompliant=true, Switch Travel=0.25mm, Termination=GullWing, Throw Configuration=SPST

## Free pads (board coordinates)
  round 3 hole 3 unplated: ""(3,3) ""(3,81) ""(75.8,3) ""(75.8,81)

## Via types
v1: diameter 0.6, hole 0.3, Top Layer to Bottom Layer, tented both sides, 19 vias

## Nets (pads, with @x,y where several pads share a name; then routed paths per layer and width w, separated by ;. In a path a pad name is that pad's centre, name@x,y a point inside that pad or via, vN(x,y) a via of type N, cw(c..) or ccw(c..) an arc to the next point about the centre after c; other vN are vias at no path point)
+3V3: E1.A2 J1.2 P2.4 P4.1 P5.1 P6.1 P7.1 P8.1 P9.1 P10.1 P11.1 P12.1 P13.1 P14.1 Q3.1 Q4.1 Q5.1 Q6.1 R1.1 R4.1 R5.1 R6.2 R9.2 R11.2 R13.2 R15.2 | length 28.4
  Top Layer w0.254: P4.1 12.832,3.217 12.832,2.268 13.7,1.4 31.9,1.4 33.8,3.3 33.8,4.671 E1.A2 33.771,6.929 v1(32.6,8.1)
+5V: J4.2 J5.2 J6.2 J7.2 J8.2 J9.2 J10.3 J11.3 P2.2 R2.1 R10.2 R12.2 R14.2 R16.2 SW1.2 SW1.5 | length 164.8
  Top Layer w0.254: SW1.2@12.3,79.279 SW1.2@12.371,79.35 ; R12.2 R12.2@67.301,52.9 ; J10.3 J10.3@70.37,30.17 ; J11.3@74.73,30.17 J11.3
  Top Layer w0.5: v1(12.3,72.5) SW1.5 SW1.2@12.3,79.279 ; R2.1 31.368,70.432 v1(31.9,69.9) ; v1(42.6,66.5) 42.6,70.5 44.5,72.4 P2.2 ; v1(53.6,66.5) 56.8,66.5 61.7,71.4 v1(66.9,71.4) ; R14.2 68.4,40.7 69.1,40 J8.2 J9.2 75.9,40 77.3,41.4 ; R12.2 68.45,52.95 69,52.4 J6.2 J7.2 76,52.4 77.3,53.7 ; R10.2 68.361,65.691 69.252,64.8 J4.2 J5.2 76.4,64.8 77.3,63.9 77.3,53.7 ; R16.2@67.3,28.6 R16.2 67.251,29.251 68.24,30.24 J10.3 ; J10.3@70.37,30.17 J11.3@74.73,30.17 ; J11.3 77.3,32.6 77.3,41.4 ; 77.3,41.4 77.3,53.7
  Bottom Layer w0.254: J5.2 J5.2@74.8,65
  Bottom Layer w0.5: v1(12.3,72.5) 29.3,72.5 v1(31.9,69.9) 35.3,66.5 v1(42.6,66.5) v1(53.6,66.5) ; v1(66.9,71.4) 66.9,66.2 68.3,64.8 J4.2
+24V: E2.A1 P1.1 P2.1 P3.1 Q1.4 R3.1 | length 148.8
  Top Layer w0.254: P1.1@68.718,79.478 P1.1
  Top Layer w0.75: R3.1 36.194,72.706 36.7,72.2 38.8,72.2 39.4,72.8 v1(39.4,75.3) 41.2,77.1 67.7,77.1 68.664,78.064 68.664,79.424 P1.1@68.718,79.478 ; Q1.4 v1(59.6,47.1)
  Bottom Layer w0.254: 68.728,78.518 68.728,79.488 P1.1
  Bottom Layer w0.75: v1(39.4,75.3) 39.4,74.8 40.35,73.85 44.34,69.86 P2.1 ; E2.A1 48.36,12.26 P3.1 49.7,18.1 50.7,19.1 59.1,19.1 66.3,26.3 66.3,46.52 62.66,50.16 ; v1(59.6,47.1) 62.66,50.16 ; 68.728,78.518 62.66,72.45 62.66,50.16
BLUE_1: *1.28 P4.3 | length 52.1
  Top Layer w0.254: P4.3 16.8,4.8 15.7,5.9 9,5.9 6,8.9 6,32.2 8.6,34.8 15.7,34.8 16.8,35.9 19.19,35.9 *1.28
BLUE_2: *1.30 P5.3 | length 30.7
  Top Layer w0.254: P5.3@16.8,10.35 16.8,11.3 15.5,12.6 11.4,12.6 10.5,13.5 10.5,18.8 12.8,21.1 12.8,27.2 16.43,30.83 *1.30
BLUE_3: *1.32 P6.3 | length 9.9
  Top Layer w0.254: P6.3 16.8,23.35 *1.32
EXT_PWR: *1.17 *1.42 P2.3 SW1.1 SW1.4 | length 108.2
  Top Layer w0.254: SW1.1 SW1.1@15.05,80
  Top Layer w0.5: SW1.1@14.871,79.35 14.871,74.75 14.871,70.429 19.2,66.1 *1.17 ; SW1.1@15.05,80 v1(17.4,80)
  Bottom Layer w0.254: *1.17@19.155,63.895 *1.17
  Bottom Layer w0.5: v1(17.4,80) 22.2,75.2 36.3,75.2 43.6,67.9 48.3,67.9 48.88,68.48 P2.3 ; *1.17@19.155,63.895 17.495,63.895 15.9,62.3 15.9,24.4 16.9,23.4 21,23.4 21.8,24.2 *1.42
EXTRA_1: *1.34 P13.2 | length 48.9
  Bottom Layer w0.254: P13.2 5,27.5 6.7,25.8 6.7,21.3 8,20 40,20 42.12,22.12 *1.34
EXTRA_2: *1.35 P14.2 | length 35.8
  Bottom Layer w0.254: P14.2 11.5,27.5 13.6,25.4 13.6,23.9 15.7,21.8 38.4,21.8 39.569,22.969 39.569,25.739 *1.35
FLOW: *1.11 Q6.2 R15.1 | length 23.4
  Top Layer w0.254: *1.11 48.95,38.45 50.9,36.5 50.9,30.8 54.4,27.3 R15.1 60.702,27.3 61.002,27 Q6.2
GND: *1.19 *1.54 D1.1 D2.1 E1.A3 J1.3 J4.3 J5.3 J6.3 J7.3 J8.3 J9.3 J10.2 J11.2 P2.10 P7.4 P8.4 P9.4 P10.4 P11.4 P12.4 P13.4 P14.4 SW2.2 | length 38.7
  Top Layer w0.254: SW2.2 22.09,80.695 23.3,79.485 23.3,78.195 v1(24.336,77.159) D1.1 ; 22.09,80.7 29.2,80.7 31.368,78.532 D2.1 ; E1.A3 38.851,7.151 v1(40.1,8.4)
  Top Layer w1: P2.10 58.1,74 v1(70.9,74)
GREEN_1: *1.36 P4.4 | length 30.1
  Top Layer w0.254: P4.4 25.519,9.969 25.519,11.679 37.04,23.2 *1.36
GREEN_2: *1.37 P5.4 | length 23.3
  Top Layer w0.254: P5.4 20.75,10.05 34.4,23.7 34.4,25.65 *1.37
GREEN_3: *1.38 P6.4 | length 17.5
  Top Layer w0.254: P6.4 24.177,16.85 31.945,24.618 31.945,25.735 *1.38
Net*1_7: *1.7 Q1.2 | length 10.1
  Top Layer w0.254: *1.7 47.21,48.6 48.8,48.6 53.03,52.83 Q1.2
NetD1_2: D1.2 R1.2 | length 2.9
  Top Layer w0.254: R1.2 27.715,75.635 27.915,75.835 D1.2
NetD2_2: D2.2 R2.2 | length 2.9
  Top Layer w0.254: R2.2 32.668,75.635 32.868,75.835 D2.2
NetD3_2: D3.2 R3.2 | length 2.9
  Top Layer w0.254: R3.2 37.494,75.635 37.694,75.835 D3.2
NetE2_A2: E2.A2 J2.2 J3.1 P3.2 | length 42.5
  Top Layer w0.254: E2.A2 cw(c53.44,3.525) 54.2,4.286 E2.A2@54.202,4.284
  Top Layer w1: E2.A2@54.202,4.284 54.385,4.1 63.1,4.1
  Bottom Layer w0.254: P3.2@52.15,13.55 P3.2 ; E2.A2 E2.A2@53.6,4.76
  Bottom Layer w1: P3.2@52.15,13.55 52.15,10.45 53.6,9 E2.A2@53.6,4.76 ; P3.2 56.3,13.6 57.45,12.45 J2.2
NetJ2_1: J2.1 J3.3 | length 16.7
  Top Layer w1: 65.7,4.1 67.2,4.1 70.9,7.8 70.9,13.2 72.65,14.95 J2.1
NetJ3_2: J3.2 Q2.4 | length 14.3
  Top Layer w0.254: Q2.4@64.4,15.99 Q2.4
  Top Layer w0.5: J3.2 Q2.4@64.4,15.99
NetJ4_1: J4.1 J5.1 Q3.3 R10.1 | length 12.4
  Top Layer w0.254: Q3.3 64.845,65.041 65.495,64.391 R10.1 67.251,63.049 68.1,62.2 70.24,62.2 J4.1 74.76,62.26 J5.1
NetJ6_1: J6.1 J7.1 Q4.3 R12.1 | length 11.6
  Top Layer w0.254: Q4.3 64.845,52.25 65.445,51.65 67.476,51.65 67.599,51.527 67.599,51.302 69.041,49.86 J6.1 74.76,49.86 J7.1
NetJ8_1: J8.1 J9.1 Q5.3 R14.1 | length 12.2
  Top Layer w0.254: Q5.3 64.794,40.05 65.444,39.4 R14.1 67.2,38.3 68,37.5 70.26,37.5 J8.1 74.76,37.46 J9.1
NetJ10_1: J10.1 J11.1 Q6.3 R16.1 | length 12.4
  Top Layer w0.254: Q6.3 64.845,27.95 65.495,27.3 R16.1 67.251,26.127 68.375,25.003 70.143,25.003 J10.1 70.36,25.1 J11.1
NetQ1_1: Q1.1 R6.1 | length 3.9
  Top Layer w0.254: R6.1 55.529,55.341 Q1.1
NetQ1_3: Q1.3 R7.2 | length 37.8
  Top Layer w0.75: Q1.3 53.03,45.339 53.469,44.9 55.361,44.9 55.8,44.461 55.8,37.9 58.8,34.9 v1(62.9,34.9) ; R7.2 55.35,21.05 v1(56.3,22)
  Bottom Layer w0.75: v1(56.3,22) 56.3,22.7 62.9,29.3 v1(62.9,34.9)
NetQ2_1: Q2.1 R7.1 R8.2 | length 15.8
  Top Layer w1: R7.1@53.8,20 51.7,20 51.7,21 55.1,24.4 58.314,24.4 58.9,23.814 Q2.1
PGND: D3.1 P1.2 P2.9 Q2.3 R8.1 | length 114.2
  Top Layer w0.254: Q2.3@58.8,15.5 Q2.3
  Top Layer w1: D3.1 36.194,78.021 37.673,79.5 v1(60.2,79.5) P1.2 ; v1(52.4,24.6) 50.15,22.35 R8.1 50.15,18.25 51.1,17.3 54.276,17.3 56.076,15.5 Q2.3@58.8,15.5
  Bottom Layer w1: v1(52.4,24.6) 52.4,27.8 60.5,35.9 60.5,41.8 56.5,45.8 56.5,63.7 60.2,67.4 60.2,70.6 ; P2.9 59.46,69.86 60.2,70.6 ; v1(60.2,79.5) 60.2,70.6
RED_1: *1.27 P4.2 | length 59
  Top Layer w0.254: v1(13.2,38.5) 13.225,38.475 19.175,38.475 *1.27
  Bottom Layer w0.254: v1(13.2,38.5) 13.2,34.6 12.2,33.6 4.1,33.6 1.6,31.1 1.6,14.9 9.4,7.1 13.9,7.1 14.8,6.2 P4.2 ; *1.27@19.15,38.5 *1.27
RED_2: *1.29 P5.2 | length 43.8
  Top Layer w0.254: P5.2@14.768,10.05 14.768,8.468 13.5,7.2 10.9,7.2 7.7,10.4 7.7,31.4 9.67,33.37 *1.29
RED_3: *1.31 P6.2 | length 14.6
  Top Layer w0.254: P6.2 14.8,26.1 17,28.3 19.19,28.3 *1.31
RESET: *1.20 SW2.1 | length 18.3
  Top Layer w0.254: *1.20 19.27,56.3 21.281,56.3 22.2,57.219 22.2,67.7 20.8,69.1 SW2.1
SCL: *1.9 P2.5 R4.2 | length 40.9
  Top Layer w0.254: P2.5 51.42,68.72 49.6,66.9 45.9,66.9 43.6,64.6 43.6,45 45.07,43.53 *1.9 47.26,43.59 53.54,43.59 R4.2
SDA: *1.10 P2.6 R5.2 | length 55.6
  Top Layer w0.254: P2.6 51.42,73.78 50.005,75.195 44.795,75.195 40.8,71.2 40.8,44.8 44.6,41 47.19,41 *1.10 50.71,40.99 52.15,39.55 R5.2
SERVO_1: *1.1 Q3.2 R9.1 | length 15.7
  Top Layer w0.254: *1.1 47.741,64.391 R9.1 60.702,64.391 61.002,64.091 Q3.2
SERVO_2: *1.2 Q4.2 R11.1 | length 25.8
  Top Layer w0.254: *1.2 50.81,61.31 52,62.5 56.6,62.5 57.9,61.2 57.9,52.1 58.4,51.6 R11.1 60.795,51.6 61.095,51.3 Q4.2
SERVO_3: *1.3 Q5.2 R13.1 | length 31
  Top Layer w0.254: v1(57.335,39.4) R13.1 60.651,39.4 60.951,39.1 Q5.2
  Bottom Layer w0.254: *1.3 50.83,58.77 52.7,56.9 52.7,44.6 57.335,39.965 v1(57.335,39.4)
SWITCH_1: *1.21 P7.2 | length 19.7
  Top Layer w0.254: P7.2 13.9,66.6 16.3,64.2 16.3,55 17.61,53.69 *1.21
SWITCH_2: *1.22 P8.2 | length 27.6
  Top Layer w0.254: P8.2 5.6,66.6 6.4,65.8 6.4,60.8 7.3,59.9 12.4,59.9 14,58.3 14,54.2 17.05,51.15 *1.22@19.4,51.15
SWITCH_3: *1.23 P9.2 | length 11
  Top Layer w0.254: P9.2 11.8,53.5 16.7,48.6 19.19,48.6 *1.23
SWITCH_4: *1.24 P10.2 | length 21.8
  Top Layer w0.254: P10.2 5.4,53.5 6.2,52.7 6.2,47.6 7.7,46.1 19.17,46.1 *1.24
SWITCH_5: *1.25 P11.2 | length 21.5
  Top Layer w0.254: v1(13.4,43.6) 19.13,43.6 *1.25
  Bottom Layer w0.254: P11.2 5.2,40.9 6.2,41.9 6.2,44.9 7.4,46.1 12.3,46.1 13.4,45 v1(13.4,43.6)
SWITCH_6: *1.26 P12.2 | length 9
  Top Layer w0.254: P12.2 10.295,40.945 19.155,40.945 *1.26
TEMP: *1.12 E1.A1 J1.1 | length 56.3
  Top Layer w0.254: E1.A1 28.691,10.791 J1.1
  Bottom Layer w0.254: E1.A1 28.691,8.991 30.6,10.9 37.5,10.9 50.3,23.7 50.3,34.5 48.8,36 47.29,36 *1.12
pads on no net: *1.4 *1.5 *1.6 *1.8 *1.13 *1.14 *1.15 *1.16 *1.18 *1.33 *1.39 *1.40 *1.41 *1.43 *1.44 *1.45 *1.46 *1.47 *1.48 *1.49 *1.50 *1.51 *1.52 *1.53 P2.7 P2.8 P7.3 P8.3 P9.3 P10.3 P11.3 P12.3 P13.3 P14.3 SW1.3 SW1.6

## Polygon pours and split planes (outlines as drawn)
GND on Bottom Layer "GND_L02_P001" (solid, pour order 1): 2.8,77.8 2.8,6.6 77.2,6.6 77.4,6.8 77.4,77.9 2.9,77.9
+3V3 on Top Layer "+3V3_L01_P000" (solid, pour order 0): 2.9,77.9 2.9,6.7 77.3,6.7 77.5,6.9 77.5,78 3,78

## Keep-outs
Keep-Out Layer:
  the board outline again, w0.254

## Silkscreen, mask and mechanical layers (free items; w line width, h text height)
Top Overlay:
  drawing of 9 lines, arcs and shapes, not listed
  text "RST" at 19.4,82.5 h1
  text "USB OFF" at 11.5,82.1 h1
  text "3v3" at 25.7,80.6 h1
  text "5v" at 31.2,80.6 h1
  text "24v" at 35.5,80.6 h1
  text "-" at 64.7,75.25 h1.5
  text "+" at 67.3,75.25 h1.5
  text "24v SECONDARY" at 63.8,73.9 h1
  text "USB_ON" at 5.5,71.867 h1
  text "-" at 71.05,69.5 h1.5 r90
  text "SERVO 1" at 61.8,68.6 h1
  text "Reed_2" at 5.867,68.367 h1 r270
  text "Reed_1" at 12.667,68.2 h1 r270
  text "SB-C-CONNECTOR" at 44.4,67.4 h1
  text "SECTION C" at 22.6,62.6 h2.5
  text "v1.0" at 29.1,59 h2.5
  text "-" at 71.05,57.1 h1.5 r90
  text "SERVO 2" at 61.633,56 h1
  text "Reed_4" at 5.867,55.3 h1 r270
  text "Reed_3" at 12.667,55.3 h1 r270
  text "SMART" at 27.516,53.602 h2.5
  text "BATTER" at 25.916,49.802 h2.5
  text "-" at 71.05,44.6 h1.5 r90
  text "SERVO 3" at 61.633,43.6 h1
  text "Reed_5" at 5.867,42.6 h1 r270
  text "Reed_6" at 12.667,42.6 h1 r270
  text "-" at 71.05,32.2 h1.5 r90
  text "FLOW SENSOR" at 57.4,31.5 h1
  text "Switch_2" at 12.667,30 h1 r270
  text "Switch_1" at 5.867,29.833 h1 r270
  text "RGB_3" at 13.467,19.267 h1
  text "+" at 49.2,16.35 h1.5
  text "-" at 51.7,16.35 h1.5
  text "SIG" at 29.9,16.3 h1
  text "+" at 33.3,16.05 h1.5
  text "-" at 35.8,16.05 h1.5
  text "TEMP SENSOR" at 42.5,13.5 h1 r270
  text "RGB_2" at 13.467,12.467 h1
  text "SOLENOID" at 57.3,11 h1 r270
  text "CURRENT LIMITER" at 71.1,6.1 h1 r90
  text "RGB_1" at 13.634,5.667 h1
Bottom Overlay:
  text "Originator: Pranav" at 24.4,5.622 h2

## Text inside footprints (layer, text, board x,y; h text height)
P2: Top Overlay "9" at 58.46,70.325 h1.02 r180; Top Overlay "10" at 59.42,72.865 h1.02 r180; Top Overlay "2" at 44.98,72.865 h1.02 r180; Top Overlay "1" at 44.88,70.325 h1.02 r180